# EAGLE board Electronics Design_PlantSynth v62 (EAGLE 9.7.0)
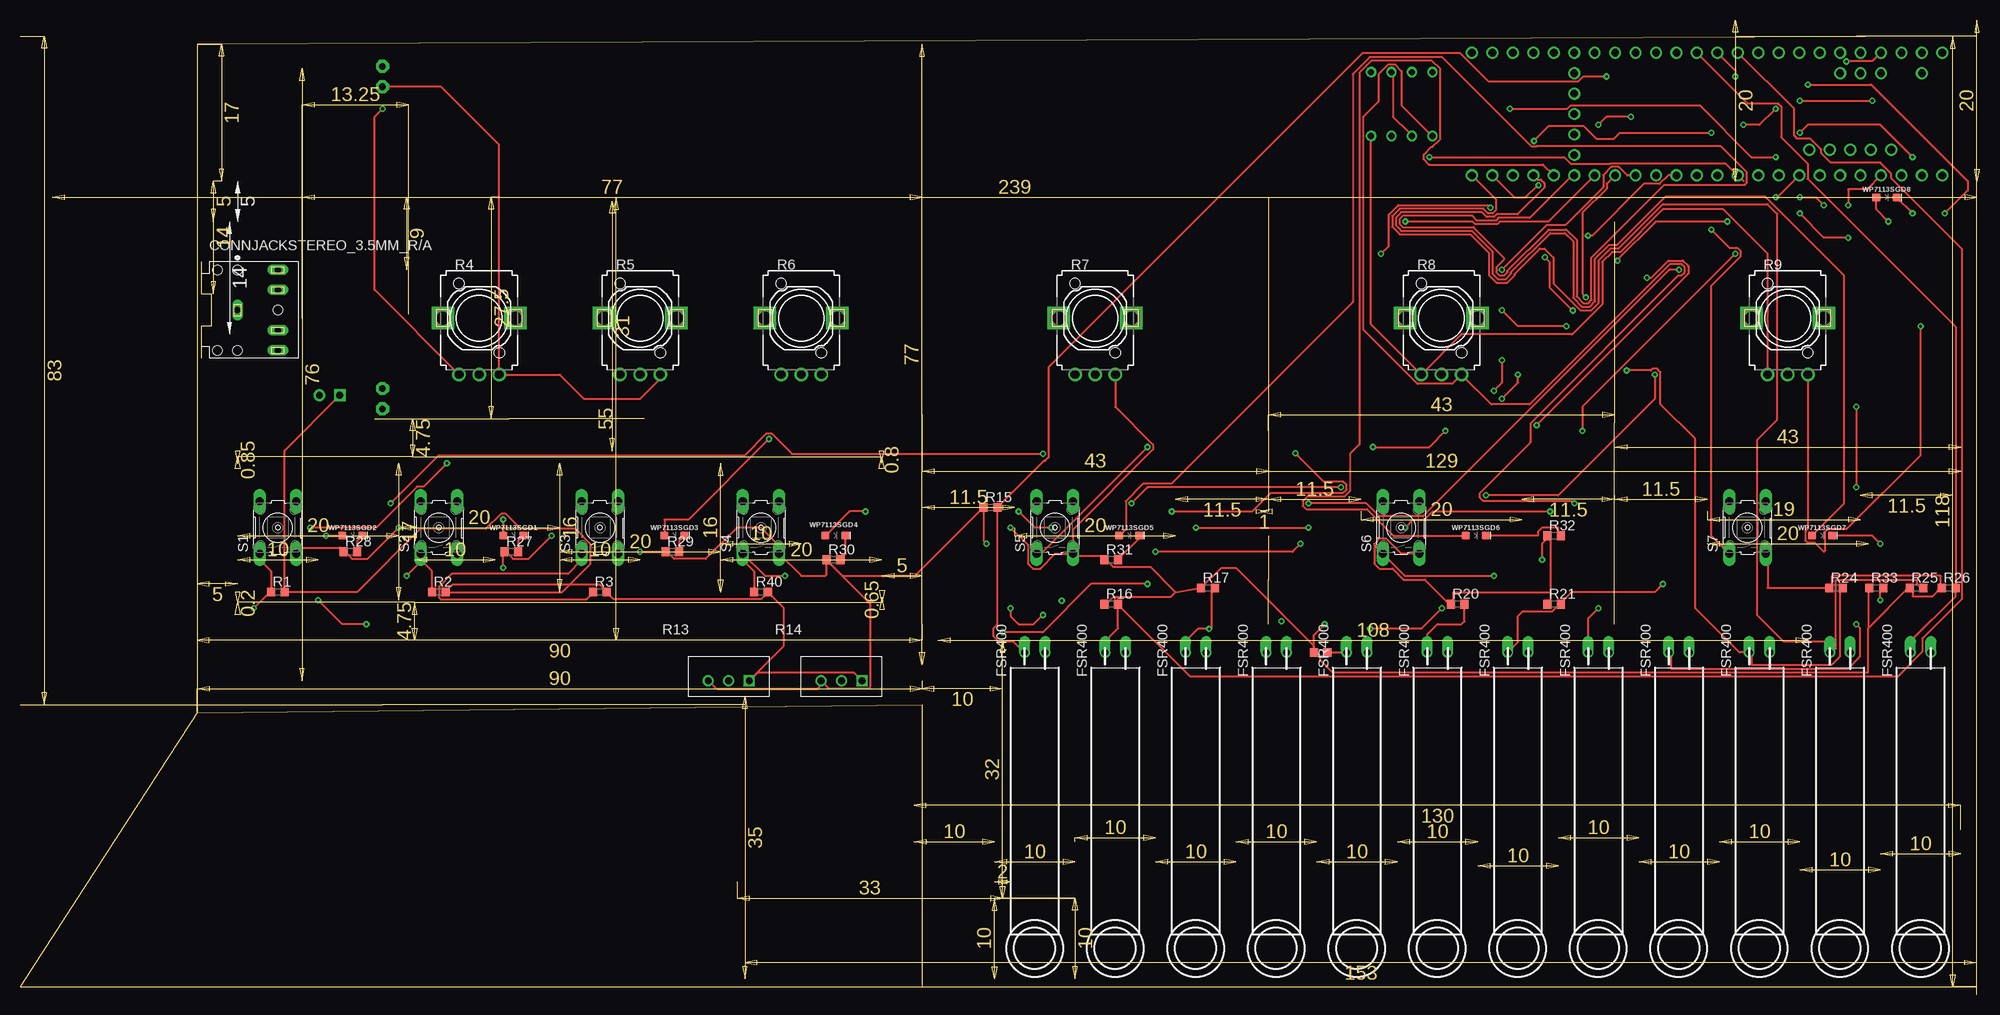
[diagram p0: board, top side]
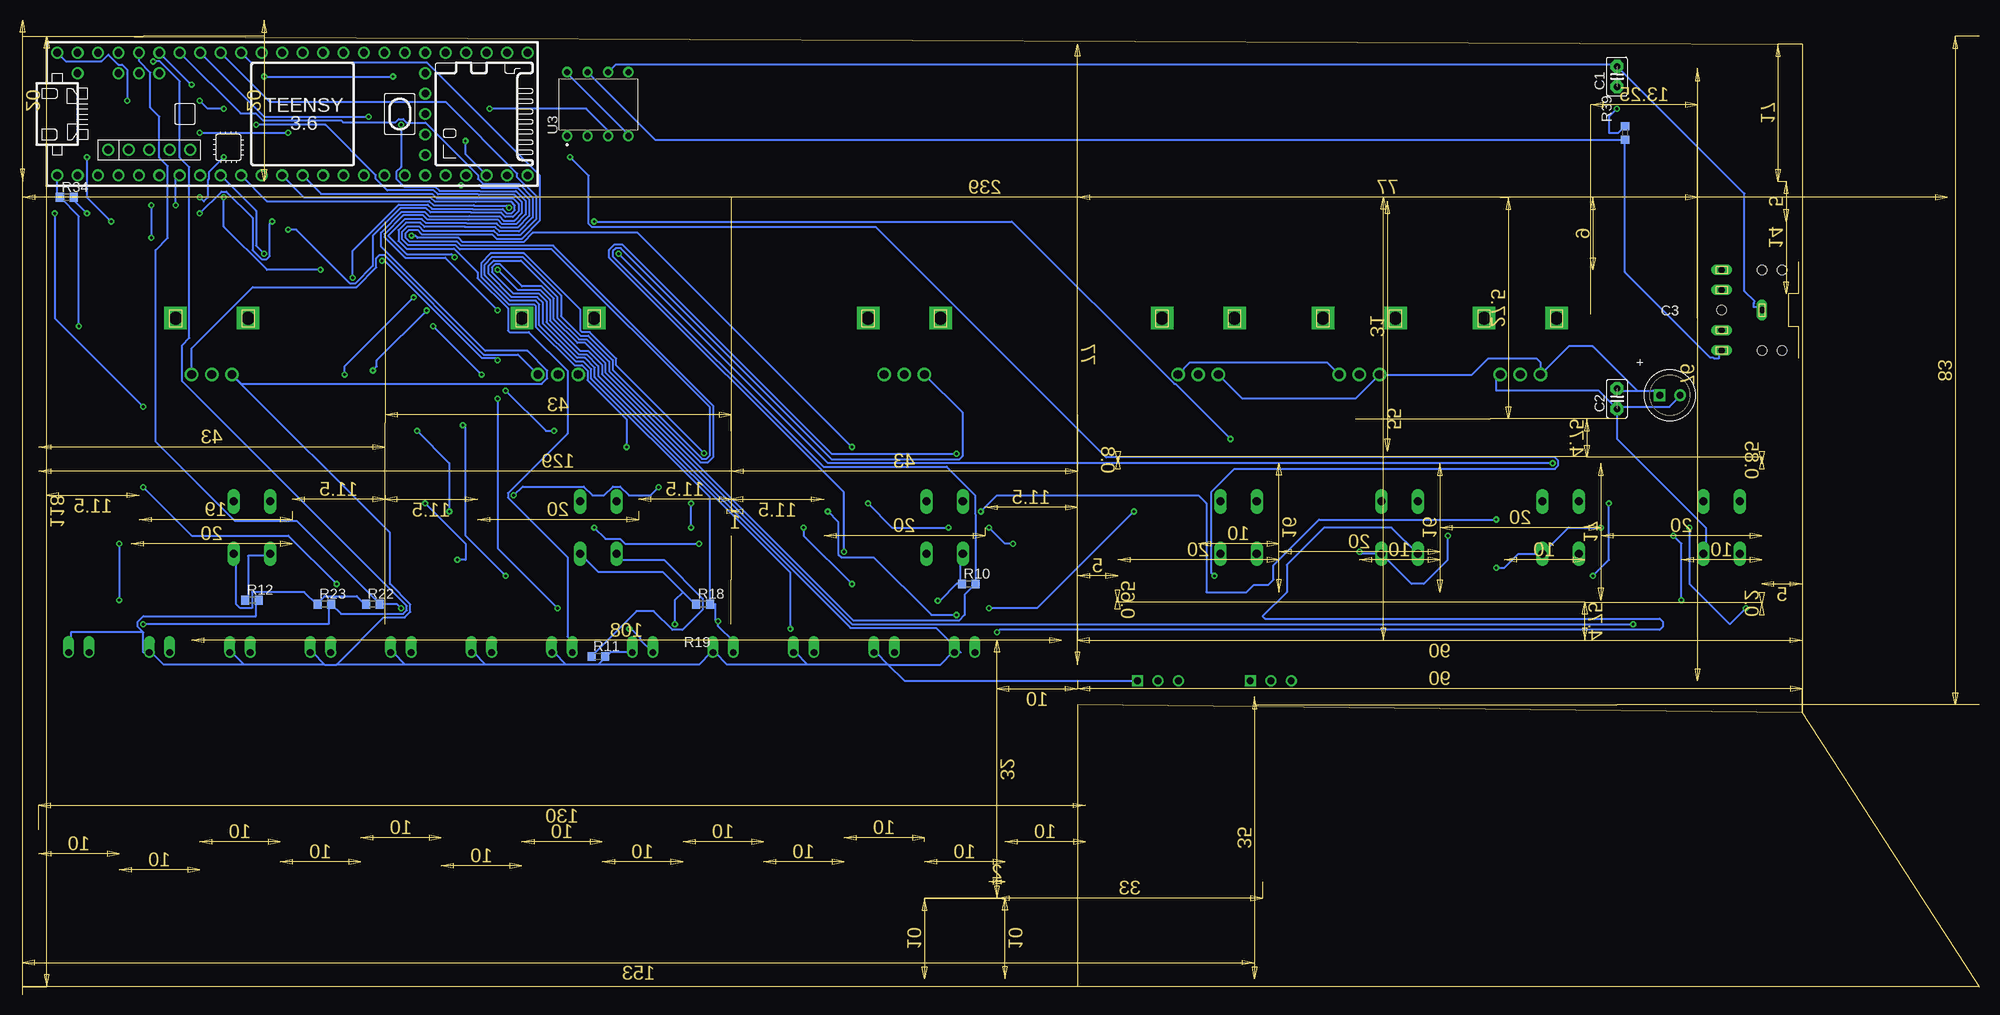
[diagram p1: board, bottom side, seen from below]

Size 243 x 118 mm. Coordinates in mm from the lower left corner, seen from the top.
Outline: 112,0 0,0 22,34
Outline: 112,0 243,0 243,118 22,117 22,34
Outline: 22,34 112,35 112,0
Copper layers (1*16): Top 0.035mm / dielectric 1.5mm / Bottom 0.035mm
Design rules "default *": minimum track width 0.24333125mm, minimum drill 0.35mm, track to track 8mil, track to pad 8mil, pad to pad 8mil, via to via 8mil, smd to smd 8mil, copper to edge 40mil, drill to drill 7mil, minimum pad ring 10mil, minimum via ring 8mil, stop-mask expansion 4mil, vias tented up to drill 0mil, thermal gap 10mil

## Footprints (pad centres in the part's own frame; a part is rotated, then mirrored left to right if it is on the bottom)
C2.5-2 = drill 0.813 pad 1.6 octagon: 1 -1.27,0; 2 1.27,0
ESK476M050AE3EA_47UF_CAP = drill 0.85 pad 1.45 square: LL+ -1.27,0 | drill 0.85 pad 1.45: LL- 1.27,0
CUI_SJ1-3525NG = drill 0.8 long: 1 0,0; 2 5,-5; 3 5,5; 4 5,-2.5; 5 5,2.5 | hole 1.2: -2.5,5; 0,5; 5,0; -2.5,-5; 0,-5
FSR400_.85 = drill 0.85 offset: P$1 -1.27,17; P$2 1.27,17
R0603 = smd 1 x 1.1: 1 -0.85,0; 2 0.85,0
EVUFXL = drill 1.1 pad 1.676: GND 2.5,-7; IN 0,-7; PWR -2.5,-7 | drill 1.6 pad 2.8 square: M1 4.5,0; M2 -4.5,0
B3B-XH-A = drill 0.85: GND -2.545,0; IN -0.005,0 | drill 0.85 square: POWER 2.545,0
B3F-10XX = drill 1.016 long: 1 -3.251,2.261; 2 3.251,2.261; 3 -3.251,-2.261; 4 3.251,-2.261
LMC555CN/NOPB-ND = drill 0.78 pad 1.13: 1 -6.51,5.08; 2 -6.51,2.54; 3 -6.51,0; 4 -6.51,-2.54; 5 1.43,-2.54; 6 1.43,0; 7 1.43,2.54; 8 1.43,5.08
TEENSY_3.5/3.6 = drill 0.965: 0/RX -25.4,-7.62; 1/TX -22.86,-7.62; 2 -20.32,-7.62; 3/CANTX -17.78,-7.62; 3V3 7.62,-7.62; 3V3_2 17.78,-2.54; 3V3_LO -22.86,7.62; 4/CANRX -15.24,-7.62; 5 -12.7,-7.62; 6 -10.16,-7.62; 7 -7.62,-7.62; 8 -5.08,-7.62; 9/CS -2.54,-7.62; 10/CS 0,-7.62; 11/MOSI 2.54,-7.62; 12/MISO 5.08,-7.62; 13/SCK 5.08,7.62; 14/A0 2.54,7.62; 15/A1 0,7.62; 16/A2 -2.54,7.62; 17/A3 -5.08,7.62; 18/A4/SDA -7.62,7.62; 19/A5/SCL -10.16,7.62; 20/A6 -12.7,7.62; 21/A7 -15.24,7.62; 21/DAC0 12.7,7.62; 22/A8 -17.78,7.62; 23/A9 -20.32,7.62; 24 10.16,-7.62; 25 12.7,-7.62; 26 15.24,-7.62; 27 17.78,-7.62; 28 20.32,-7.62; 29 22.86,-7.62; 30 25.4,-7.62; 31/A12 27.94,-7.62; 32/A13 30.48,-7.62; 33/A14 30.48,7.62; 34/A15 27.94,7.62; 35/A16 25.4,7.62; 36/A17 22.86,7.62; 37/A18 20.32,7.62; 38/A19 17.78,7.62; 39/A20 15.24,7.62; A10 -17.78,5.08; A11 -15.24,5.08; A22/DAC1 10.16,7.62; AGND -25.4,7.62; AREF -20.32,5.08; GND -27.94,-7.62; GND2 7.62,7.62; GND3 17.78,0; PROG 17.78,2.54; RESET 17.78,5.08; U5V -21.59,-4.445; UD+ -16.51,-4.445; UD- -19.05,-4.445; UGND1 -13.97,-4.445; UGND2 -11.43,-4.445; VBAT 17.78,-5.08; VIN -27.94,7.62; VUSB -25.4,5.08
LEDGREENDIFFUSED5MM = smd 1 x 1: A+ -1,0; C- 1.5,0

## Placement (x,y rotation side)
C1  4700pF  [C2.5-2]  45,113 90 bottom
C2  0.1uF  [C2.5-2]  45,73 90 bottom
C3  47uF  [ESK476M050AE3EA_47UF_CAP]  38.43,73.42 0 bottom
CONNJACKSTEREO_3.5MM_R/A  SJ1-3525NG  [CUI_SJ1-3525NG]  27,84 0 top
FSR1  FSR400_0.85  [FSR400_.85]  126,24.5 0 top
FSR2  FSR400_0.85  [FSR400_.85]  136,24.5 0 top
FSR3  FSR400_0.85  [FSR400_.85]  146,24.5 0 top
FSR4  FSR400_0.85  [FSR400_.85]  156,24.5 0 top
FSR5  FSR400_0.85  [FSR400_.85]  166,24.5 0 top
FSR6  FSR400_0.85  [FSR400_.85]  176,24.5 0 top
FSR7  FSR400_0.85  [FSR400_.85]  186,24.5 0 top
FSR8  FSR400_0.85  [FSR400_.85]  196,24.5 0 top
FSR9  FSR400_0.85  [FSR400_.85]  206,24.5 0 top
FSR10  FSR400_0.85  [FSR400_.85]  216,24.5 0 top
FSR11  FSR400_0.85  [FSR400_.85]  226,24.5 0 top
FSR12  FSR400_0.85  [FSR400_.85]  236,24.5 0 top
R1  10k  [R0603]  32,49 0 top
R2  10k  [R0603]  52,49 0 top
R3  10k  [R0603]  72,49 0 top
R4  EVU-F3LFL3D14F3L  [EVUFXL]  57,83 0 top
R5  EVU-F3LFL3D14F3L  [EVUFXL]  77,83 0 top
R6  EVU-F3LFL3D14F3L  [EVUFXL]  97,83 0 top
R7  EVU-F3LFL3D14F3L  [EVUFXL]  133.5,83 0 top
R8  EVU-F3LFL3D14F3L  [EVUFXL]  176.5,83 0 top
R9  EVU-F3LFL3D14F3L  [EVUFXL]  219.5,83 0 top
R10  10k  [R0603]  125.5,50 0 bottom
R11  10k  [R0603]  171.5,41 0 bottom
R12  10k  [R0603]  214.5,48 0 bottom
R13  [B3B-XH-A]  88,38 0 top
R14  [B3B-XH-A]  102,38 0 top
R15  10k  [R0603]  120.5,59.5 0 top
R16  10k  [R0603]  135.5,47.5 0 top
R17  10k  [R0603]  147.5,49.5 0 top
R18  10k  [R0603]  158.5,47.5 0 bottom
R19  10k  [R0603]  161.5,41.5 0 top
R20  10k  [R0603]  178.5,47.5 0 top
R21  10k  [R0603]  190.5,47.5 0 top
R22  10k  [R0603]  199.5,47.5 0 bottom
R23  10k  [R0603]  205.5,47.5 0 bottom
R24  10k  [R0603]  225.5,49.5 0 top
R25  10k  [R0603]  235.5,49.5 0 top
R26  10k  [R0603]  239.5,49.5 0 top
R27  125  [R0603]  61,54 0 top
R28  125  [R0603]  41,54 0 top
R29  125  [R0603]  81,54 0 top
R30  125  [R0603]  101,53 0 top
R31  125  [R0603]  135.5,53 0 top
R32  125  [R0603]  190.5,56 0 top
R33  125  [R0603]  230.5,49.5 0 top
R34  125  [R0603]  237.5,98 0 bottom
R39  100k  [R0603]  44,106 90 bottom
R40  10k  [R0603]  92,49 0 top
S1  [B3F-10XX]  32,57 90 top
S2  [B3F-10XX]  52,57 90 top
S3  [B3F-10XX]  72,57 90 top
S4  [B3F-10XX]  92,57 90 top
S5  [B3F-10XX]  128.5,57 90 top
S6  [B3F-10XX]  171.5,57 90 top
S7  [B3F-10XX]  214.5,57 90 top
U3  LMC555CN  [LMC555CN/NOPB-ND]  170.29,112.11 90 bottom
U$1  TEENSY_3.5/3.6  [TEENSY_3.5/3.6]  210.77,108.34 0 bottom
WP7113SGD1  [LEDGREENDIFFUSED5MM]  61,56 0 top
WP7113SGD2  [LEDGREENDIFFUSED5MM]  41,56 0 top
WP7113SGD3  [LEDGREENDIFFUSED5MM]  81,56 0 top
WP7113SGD4  [LEDGREENDIFFUSED5MM]  101,56 0 top
WP7113SGD5  [LEDGREENDIFFUSED5MM]  137.5,56 0 top
WP7113SGD6  [LEDGREENDIFFUSED5MM]  180.5,56 0 top
WP7113SGD7  [LEDGREENDIFFUSED5MM]  223.5,56 0 top
WP7113SGD8  [LEDGREENDIFFUSED5MM]  231.5,98 0 top

## Library data of the parts
C1 C2 = capacitor-wima
C3 = Capacitor_47uF
CONNJACKSTEREO_3.5MM_R/A = SJ1-3525NG; MANUFACTURER: CUI; PARTREV: 1.01; STANDARD: Manufacturer recommendation
FSR1-FSR12 = FSR400
R1-R3 R10-R12 R15-R34 R39 R40 = rcl; SPICEPREFIX: R
R4-R9 = EVU-F3LFL3D14_US
R13 R14 = Pot_16mm
S1-S7 = B3F-1020_OMRON; MPN: B3F-1000; OC_FARNELL: 176432; OC_NEWARK: 36M3542
U3 = LMC555CN:NOPB-ND
U$1 = Teensy356
WP7113SGD1-WP7113SGD8 = KingBright_LED_WP7113SGD

## Nets
2: U$1.2 WP7113SGD4.A+
5: U3.3 U$1.5
6: R3.1 S3.1 U$1.6
7: R2.1 S2.1 U$1.7
8: R1.1 S1.1 U$1.8
9: R40.1 S4.1 U$1.9/CS
10: R11.1 S6.1 U$1.10/CS
11: R12.1 S7.1 U$1.11/MOSI
12: R10.1 S5.1 U$1.12/MISO
24: U$1.24 WP7113SGD2.A+
25: U$1.25 WP7113SGD1.A+
26: U$1.26 WP7113SGD3.A+
27: U$1.27 WP7113SGD5.A+
28: U$1.28 WP7113SGD6.A+
29: U$1.29 WP7113SGD7.A+
30: U$1.30 WP7113SGD8.A+
A0: FSR12.P$1 R26.2 U$1.14/A0
A1: FSR1.P$1 R15.2 U$1.15/A1
A2: FSR2.P$1 R16.2 U$1.16/A2
A3: FSR3.P$1 R17.2 U$1.17/A3
A4: FSR4.P$1 R18.2 U$1.18/A4/SDA
A5: FSR5.P$1 R19.2 U$1.19/A5/SCL
A6: FSR6.P$1 R20.2 U$1.20/A6
A7: FSR7.P$1 R21.2 U$1.21/A7
A8: FSR8.P$1 R22.2 U$1.22/A8
A9: FSR9.P$1 R23.2 U$1.23/A9
A12: FSR10.P$1 R24.2 U$1.31/A12
A13: FSR11.P$1 R25.2 U$1.32/A13
A14: R13.IN
A15: R14.IN
A16: R7.IN
A17: R8.IN
A18: R9.IN
A19: R4.IN
A20: R5.IN
A21: R6.IN
GND: C1.1 C2.1 C3.LL- R4.GND R5.GND R6.GND R7.GND R8.GND R9.GND R13.GND R14.GND R15.1 R16.1 R17.1 R18.1 R19.1 R20.1 R21.1 R22.1 R23.1 R24.1 R25.1 R26.1 R27.1 R28.1 R29.1 R30.1 R31.1 R32.1 R33.1 R34.1 S1.3 S2.3 S3.3 S4.3 S5.3 S6.3 S7.3 U3.1 U$1.GND
N$1: R28.2 WP7113SGD2.C-
N$2: R27.2 WP7113SGD1.C-
N$3: R29.2 WP7113SGD3.C-
N$4: R30.2 WP7113SGD4.C-
N$5: R31.2 WP7113SGD5.C-
N$6: R32.2 WP7113SGD6.C-
N$7: R33.2 WP7113SGD7.C-
N$8: R34.2 WP7113SGD8.C-
SLEEVE: C1.2 CONNJACKSTEREO_3.5MM_R/A.1 U3.2 U3.6
TIP: CONNJACKSTEREO_3.5MM_R/A.2 R39.1 U3.7
VCC: C2.2 C3.LL+ FSR1.P$2 FSR2.P$2 FSR3.P$2 FSR4.P$2 FSR5.P$2 FSR6.P$2 FSR7.P$2 FSR8.P$2 FSR9.P$2 FSR10.P$2 FSR11.P$2 FSR12.P$2 R1.2 R2.2 R3.2 R4.PWR R5.PWR R6.PWR R7.PWR R8.PWR R9.PWR R10.2 R11.2 R12.2 R13.POWER R14.POWER R39.2 R40.2 U3.4 U3.8 U$1.VIN

## Tracks (layer width: path | path; a pad name or v marks a point on that pad's centre or on a via)
2  (via drill 0.35)
  Top 0.243: U$1.2 229.37,99 227,99 v227,97 | v227,93 224,93 v221,96 | v183,74 184,75 v184,77.78 | v177,69 175,67 v168,67 | v143,59 153,59 155.3,61.3 164.29,61.3 164.7,61.71 164.7,62.29 164.29,62.7 161.89,62.7 v158.35,66.24 | v105,59 103,59 WP7113SGD4.A+ | v123,47 123,45.99 123.99,45 125.85,45 v127,46.15 | v212,95 203.12,95 198.37,90.25 v198.37,90.14
  Bottom 0.243: v227,97 v227,93 | v183,74 178,69 v177,69 | v123,47 117,47 v105,59 | v221,96 v220.99,96 218.29,98.7 217.71,98.7 214.45,95.44 214.45,91.45 213.29,90.3 212.71,90.3 212.3,90.71 212.3,94.7 v212,95 | v143,59 141.7,57.7 141.7,53.71 141.29,53.3 137.3,53.3 130.15,46.15 v127,46.15 | v158.35,66.24 169.26,77.15 169.26,77.96 172.58,81.28 173.53,81.28 173.72,81.47 173.72,84.04 180.73,91.04 184.85,91.04 186.04,89.85 186.04,88.15 182.61,84.72 179.47,84.72 179.28,84.53 179.28,81.96 174.47,77.16 173.52,77.16 172.84,76.48 172.84,75.31 168,70.47 | 168,70.47 v168,67 | v198.37,90.14 198,90.14 185.9,78.04 184.26,78.04 v184,77.78 | 168,70.47 v168,67 | 168,70.47 v168,67
5  (via drill 0.35)
  Top 0.243: v185,109 192.14,109 192.55,109.4 208.6,109.4 215,103 v218,103 | v221,98 223,98 v224,97
  Bottom 0.243: U3.3 170.29,106.29 173,109 v185,109 | v218,103 219.87,101.13 219.87,100.28 220,100.15 220,97.99 220.49,97.49 v221,98 | v224,97 224,100.19 U$1.5
6  (via drill 0.35)
  Top 0.243: S3.1 69.74,52.99 68.02,51.27 53.61,51.27 52.02,49.69 52.02,48.31 52.22,48.12 70.33,48.12 71.15,48.95 R3.1 | U$1.6 218.21,98 v218,98 | v160,60 167.19,60 168.79,58.4 174.21,58.4 204.81,89 v206,89 | v122,44 127,44 133,50 v140,50 | v146,57 v160,57
  Bottom 0.243: v140,50 146,56 v146,57 | v160,57 v160,60 | v218,98 218,94.37 212.63,89 v206,89 | v122,44 121.7,44.3 39.71,44.3 39.3,44.71 39.3,45.29 39.71,45.7 88.7,45.7 89,46 86,49 86,52.37 81.37,57 72.99,57 S3.1
7  (via drill 0.35)
  Top 0.243: R2.1 51.15,51.58 49.74,52.99 S2.1 49.74,52.74 v48,51 | v213,91 194,72 v194,69 | v190,59 175.44,59 174.4,57.96 172.96,57.96 v172,57 | v159,55 158,54 v141,54 | v46,60 52,66 90.01,66 92.71,68.7 93.29,68.7 95.84,66.15 v127,66.15
  Bottom 0.243: U$1.7 214,96.33 214,92 v213,91 | v194,69 190,65 v190,59 | v159,55 168.19,55 168.79,55.6 170.6,55.6 v172,57 | v46,60 46,53 v48,51 | v141,54 141,61.37 170.15,90.52 170.15,91.48 169.48,92.15 168.52,92.15 142.52,66.15 v127,66.15
8  (via drill 0.35)
  Top 0.243: S1.1 29.74,52.99 31.15,51.58 R1.1 31,49 v29,47 | v53,65 50.1,62.1 49.29,62.1 44.19,57 v36,57 | v182.57,96.72 182.25,97.04 171.15,97.04 169.96,95.85 169.96,91.96 v169,91
  Bottom 0.243: v169,91 143,65 v53,65 | v36,57 36,50 31,45 v29,47 | v182.57,96.72 | U$1.8 212.66,97.53 192.49,97.53 191.97,97.02 186.95,97.02 186.92,96.98 182.83,96.98 v182.57,96.72
9  (via drill 0.35)
  Top 0.243: R40.1 91.15,51.58 89.74,52.99 S4.1 92.49,51 v95,51 | v175,103 191.75,103 192.55,102.2 197.41,102.2 197.44,102.23 211.77,102.23 214,100 214,100.03 U$1.9/CS
  Bottom 0.243: v95,51 95.35,51.35 95.35,61.46 92.51,64.3 52.71,64.3 52.3,64.71 52.3,65.29 52.71,65.7 108.44,65.7 137.04,94.3 172.29,94.3 172.7,94.71 172.7,100.7 v175,103
10  (via drill 0.35)
  Top 0.243: v183,51 171.99,51 S6.1 | v188.31,69.69 207.15,88.52 207.15,89.48 206.48,90.15 204.69,90.15 202.54,88 v202,88
  Bottom 0.243: S6.1 169.24,52.99 163.33,52.99 158.53,48.19 158.53,46.81 161.04,44.3 162.29,44.3 164.62,46.62 166.78,46.62 172.35,41.05 R11.1 | v183,51 188,56 188,69.37 v188.31,69.69 | v202,88 202,91.37 196.29,97.08 192.67,97.08 192.16,96.57 187.14,96.57 187.1,96.53 183.38,96.53 182.86,96.02 182.28,96.02 181.87,96.43 181.87,97.01 182.28,97.43 186.73,97.43 186.77,97.47 191.79,97.47 192.3,97.98 208.02,97.98 U$1.10/CS
11  (via drill 0.35)
  Top 0.243: S7.1 210,55.99 210,87.01 213.7,90.71 213.7,91.29 213.29,91.7 212.3,91.7 v210,94
  Bottom 0.243: R12.1 215,48 215,53.5 212.5,53.5 S7.1 | v210,94 208.99,94 202.29,87.3 201.71,87.3 199.52,89.49 199.52,93.23 196.1,96.64 192.86,96.64 192.34,96.13 187.32,96.13 187.29,96.09 183.56,96.09 183.04,95.57 182.09,95.57 181.42,96.24 181.42,97.19 182.1,97.88 186.55,97.88 186.58,97.91 191.6,97.91 192.12,98.42 205.93,98.42 U$1.11/MOSI
12  (via drill 0.35)
  Top 0.243: v140,67 126.75,53.75 S5.1 | v194.7,93.26 195.22,93.26 201.63,99.66 203.59,99.66 204.65,100.72 U$1.12/MISO
  Bottom 0.243: 126.5,50 127,50 129,48 v129.35,47.92 | 126.5,50 126.5,53.5 S5.1 | 126.5,50 R10.1 | v140,67 166.6,93.6 179.63,93.6 180.79,92.44 188.33,92.44 188.86,92.96 193.96,92.96 194.26,93.26 v194.7,93.26
24  (via drill 0.35)
  Top 0.243: U$1.24 199.57,100.72 198.51,101.78 197.63,101.78 196.59,100.75 196.59,99.28 191.86,94.55 189.55,94.55 v184,89 | v38,56 WP7113SGD2.A+ | v43,45 40,45 v37,48
  Bottom 0.243: v184,89 181.51,86.51 178.73,86.51 177.49,85.27 177.49,82.7 173.74,78.95 172.78,78.95 171.05,77.22 171.05,76.05 140,45 v43,45 | v37,48 37,55 v38,56
25  (via drill 0.35)
  Top 0.243: v203,76 203,73 191,61 v182,61 | v164,62 140,62 v138,60 | v128,57 126,57 v124,59 | v60,58 WP7113SGD1.A+ | U$1.25 197.03,99.69 197.03,99.1 194,96.06 194,86 v194.43,85.57
  Bottom 0.243: v203,76 203,77 v194.43,85.57 | v164,62 165,61 167.69,61 168.79,62.1 169.69,62.1 170.79,61 172.21,61 173.31,62.1 180.9,62.1 v182,61 | v138,60 135,57 v128,57 | v124,59 122,61 97,61 96,60 96,49 91,49 90.1,49.9 88.29,49.9 87.65,50.54 87.65,52.35 82,58 v60,58
26  (via drill 0.35)
  Top 0.243: U$1.26 189.81,95 183.74,95 183.41,94.68 180.72,94.68 180.4,95 v172,95 | v93,68 83,58 80,58 WP7113SGD3.A+
  Bottom 0.243: v93,68 99.84,74.84 99.98,74.84 120.14,95 v172,95
27
  Top 0.243: WP7113SGD5.A+ 137.3,56.8 137.3,60.29 139.45,62.45 142.95,62.45 165.49,84.99 165.49,113.28 167.61,115.4 176.6,115.4 187.71,104.3 188.29,104.3 188.32,104.32 211.21,104.32 214.45,101.08 214.45,99.81 214.19,99.55 204.15,99.55 195.13,90.53 195.13,85.28 194.72,84.87 194.14,84.87 193.3,85.71 193.3,92.71 192,94.01 189.83,94.01 184.7,88.88 184.7,88.71 184.29,88.3 183.71,88.3 183.3,88.71 183.3,89.29 184.25,90.24 184.25,90.52 180.47,94.3 171.71,94.3 171.3,94.71 171.3,95.29 171.71,95.7 180.33,95.7 180.91,95.12 183.23,95.12 183.55,95.45 187.45,95.45 192.73,100.72 U$1.27
28
  Top 0.243: U$1.28 189.12,102.05 174.96,102.05 174.3,102.71 174.3,103.29 175.26,104.25 175.4,104.25 176.34,105.2 176.34,113.94 175.32,114.95 167.79,114.95 166.34,113.5 166.34,67.33 165.15,66.14 165.15,61.52 164.48,60.85 159.86,60.85 159.3,60.29 159.3,59.71 159.71,59.3 167.26,59.3 170.56,56 WP7113SGD6.A+
29
  Top 0.243: WP7113SGD7.A+ 226.47,59.97 226.47,88.3 216.64,98.12 204.35,98.12 198.34,92.11 197.34,92.11 195.58,90.34 195.58,85.1 194.9,84.42 193.95,84.42 192.85,85.52 192.85,92.52 191.81,93.56 190.01,93.56 185.15,88.7 185.15,88.52 184.48,87.85 183.52,87.85 182.85,88.52 182.85,91.28 180.28,93.85 171.52,93.85 170.85,94.52 170.85,95.48 171.52,96.15 181.51,96.15 182.09,95.57 183.04,95.57 183.37,95.89 185.94,95.89 189.26,99.22 189.26,99.8 188.85,100.21 188.42,100.21 U$1.29
30  (via drill 0.35)
  Top 0.243: v188,105 189.86,106.86 194.14,106.86 195.71,105.3 197.93,105.3 198.63,106 v210,106 | v221,106 222,107 231,107 v235,103 | v232,95 230.5,96.5 WP7113SGD8.A+
  Bottom 0.243: U$1.30 188,103.36 v188,105 | v221,106 v210,106 | v235,103 235,98 v232,95
A0
  Top 0.243: FSR12.P$1 234.73,42.86 240.35,48.48 R26.2 240.35,81.92 221.99,100.28 221.99,102.2 218.7,105.49 218.7,109.29 218.29,109.7 214.49,109.7 U$1.14/A0
A1  (via drill 0.35)
  Top 0.243: U$1.15/A1 213,113.73 v213,113 | v197,113 194.07,113 193.43,112.36 182.39,112.36 178.85,115.9 166.7,115.9 127.7,76.9 127.7,65.71 127.29,65.3 127.15,65.3 R15.2 121.35,44.98 120.85,44.48 120.85,43.52 121.52,42.85 123.38,42.85 FSR1.P$1
  Bottom 0.243: v213,113 v197,113
A2
  Top 0.243: FSR2.P$1 134.73,42.86 136.35,44.48 R16.2 136.35,47.45 145.25,38.55 233.2,38.55 236.27,41.62 236.27,43.27 241.18,48.18 241.18,91.55 232.36,100.37 232.36,100.95 231,102.31 224.82,102.31 223.68,103.46 223.68,103.92 222.3,105.3 220.71,105.3 220.3,105.71 220.3,108.97 U$1.16/A2
A3  (via drill 0.35)
  Top 0.243: R17.2 148,49.5 148,44.5 v147.65,44.42 146.29,44.42 144.73,42.86 FSR3.P$1
  Bottom 0.243: U$1.17/A3 214.58,114.69 192.76,114.69 178.74,100.68 178.74,95.13 180.98,92.89 184.15,92.89 184.67,93.41 193.41,93.41 193.97,93.96 194.99,93.96 195.41,93.55 195.41,92.97 194.96,92.52 189.04,92.52 188.52,91.99 177.1,91.99 157.2,72.09 157.2,65.77 157.88,65.09 158.83,65.09 170.16,76.42 170.16,77.59 172.95,80.38 173.9,80.38 176.6,83.07 176.6,85.64 181.1,90.15 184.48,90.15 185.15,89.48 185.15,88.52 182.24,85.62 179.1,85.62 178.38,84.9 178.38,82.33 174.1,78.06 173.15,78.06 171.94,76.85 171.94,75.68 147.65,51.39 v147.65,44.42
A4  (via drill 0.35)
  Bottom 0.243: 156.65,45.42 157,45.5 157,47.5 R18.2 157.65,60.76 172.39,75.5 172.39,76.67 173.33,77.61 174.29,77.61 178.83,82.15 178.83,84.72 179.28,85.17 182.43,85.17 185.6,88.34 185.6,89.66 184.66,90.6 180.92,90.6 176.15,85.83 176.15,83.26 173.72,80.83 172.76,80.83 169.71,77.78 169.71,76.61 158.64,65.54 158.06,65.54 157.65,65.95 157.65,71.91 177.28,91.54 188.7,91.54 189.23,92.07 195.14,92.07 195.85,92.78 195.85,93.73 195.18,94.41 193.78,94.41 193.23,93.86 184.49,93.86 183.97,93.34 181.17,93.34 179.19,95.32 179.19,98.12 181.56,100.49 181.56,100.95 190.41,109.81 212.23,109.81 U$1.18/A4/SDA | FSR4.P$1 154.73,42.86 156.65,44.78 156.65,45.42 | 156.65,45.42 v156.62,45.39
A5  (via drill 0.35)
  Top 0.243: R19.2 FSR5.P$1 | v196,107 197,108 v200,108 | v184,84 186,82 v192,82 | v186,76 186,75 v184,73 | v176.57,47 173.99,44.42 v167.65,44.42
  Bottom 0.243: FSR5.P$1 166.27,43.04 166.27,43.27 167.41,44.42 v167.65,44.42 | U$1.19/A5/SCL 212.97,108 v200,108 | v196,107 196,101.75 196.59,101.16 196.59,100.28 195.62,99.32 191.75,99.32 191.23,98.81 186.21,98.81 186.18,98.77 181.73,98.77 180.53,97.56 180.53,95.87 181.72,94.68 183.41,94.68 183.93,95.19 187.66,95.19 187.69,95.23 192.71,95.23 193.22,95.75 195.73,95.75 198.04,93.44 198.04,93.07 195.48,90.51 190.51,90.51 v184,84 | v192,82 v186,76 | v184,73 184,54.43 v176.57,47
A6
  Top 0.243: FSR6.P$1 174.73,43.73 176,45 179,45 179.35,45.35 R20.2
  Bottom 0.243: U$1.20/A6 215.93,108.42 214.02,108.42 213.15,107.55 203.45,107.55 203.2,107.3 196.7,107.3 196.29,107.7 195.71,107.7 195.29,107.28 192.97,107.28 186.43,100.75 186.43,100.28 185.81,99.66 181.36,99.66 179.63,97.94 179.63,95.5 181.35,93.78 183.78,93.78 184.3,94.3 188.03,94.3 188.06,94.34 193.08,94.34 193.59,94.85 195.36,94.85 196.3,93.92 196.3,92.59 195.33,91.62 189.41,91.62 186.49,88.7 186.49,87.97 182.72,84.2 182.72,81.47 182.53,81.28 180.13,81.28 175.34,76.48 175.34,68.66 182.7,61.29 182.7,60.71 175.34,53.34 175.34,43.47 174.73,42.86 FSR6.P$1
A7  (via drill 0.35)
  Top 0.243: FSR7.P$1 186,42.77 186,46 186.62,46.62 190.28,46.62 191.16,47.5 | 191.16,47.5 R21.2 | v222,112 229.86,112 241.86,100 241.86,98.86 v239,96 | v228,72 v228,62 | v204,50 203,49 192.66,49 191.16,47.5
  Bottom 0.243: U$1.21/A7 222.04,112 v222,112 | v239,96 239,83 v228,72 | v228,62 222,56 210,56 v204,50
A8  (via drill 0.35)
  Top 0.243: FSR8.P$1 194.73,45.73 v196,47
  Bottom 0.243: v196,47 196.5,47.5 R22.2 198.65,47.55 208.9,57.8 216.6,57.8 226.47,67.66 226.47,91.44 224.95,92.96 224.95,101.88 226.01,102.94 226.01,108.03 227.12,109.14 227.12,113.5 228.53,114.9 228.53,115.94 U$1.22/A8
A9  (via drill 0.35)
  Top 0.243: v228,45 228.5,44.5 228.5,41 227,39.5 205,39.5 205,41.5 FSR9.P$1 | U$1.23/A9 230.03,114.9 226.81,114.9 v226.78,114.87
  Bottom 0.243: v228,45 205,45 205,47.5 R23.2 203.45,46.3 195.71,46.3 195.3,46.71 195.3,47.29 223.16,75.16 223.16,79.65 222.28,80.54 222.28,101.75 223.47,102.94 223.47,112.38 225.95,114.87 v226.78,114.87
A12  (via drill 0.35)
  Top 0.243: R24.2 226,49.5 226,41 225,40 215,40 215,41.5 FSR10.P$1 213.5,41.5 208,47 208,68 203.7,72.3 203.7,76.29 203.29,76.7 202.71,76.7 202.51,76.5 v199.5,76.5 | U$1.31/A12 185.55,98 186.94,98 188.45,99.51 v188.56,99.51 | v189.35,90.57 189.96,89.96 189.96,86.79 v192.8,83.95
  Bottom 0.243: v199.5,76.5 199,77 199,77.75 v192.8,83.95 | v188.56,99.51 186.29,99.51 185.99,99.21 181.54,99.21 180.08,97.75 180.08,95.69 181.54,94.23 183.6,94.23 184.12,94.75 187.84,94.75 187.88,94.79 192.9,94.79 193.41,95.3 195.55,95.3 197.59,93.26 195.29,90.96 189.74,90.96 v189.35,90.57
A13
  Top 0.243: R25.2 236,49.5 235.5,50 235.5,50.5 225.5,50.5 225.5,42 225,41.5 FSR11.P$1 224.73,42.86 218.97,42.86 215.67,46.15 215.67,67.85 218.16,70.34 218.16,95.97 216.99,97.15 204.01,97.15 198.52,91.66 197.52,91.66 196.02,90.16 196.02,84.91 195.09,83.98 193.77,83.98 190.4,87.34 190.4,90.51 189.29,91.62 188.71,91.62 185.6,88.51 185.6,88.34 184.66,87.4 183.34,87.4 182.4,88.34 182.4,91.1 180.1,93.4 171.34,93.4 170.4,94.34 170.4,95.66 171.34,96.6 181.7,96.6 182.28,96.02 182.86,96.02 183.27,96.43 183.27,97.74 U$1.32/A13
GND  (via drill 0.35)
  Top 0.243: S7.3 217,53.5 217,49.5 R24.1 225,49.5 225,51 238.5,51 238.5,49.5 | 229.5,44.5 229.5,49.5 R33.1 | 229.5,44.5 229.5,39 163,39 161.5,40.5 161.5,41 161,41.5 R19.1 | 229.5,44.5 234.5,49.5 R25.1 235,49.5 235,48.5 237.5,48.5 238.5,49.5 | 238.5,49.5 R26.1 | 190,56 190,49 | 190,49 190,47.5 R21.1 | 190,56 R32.1 | 190,49 178,49 178,47.5 R20.1 177.5,47.5 174.45,50.55 171.8,50.55 170.46,51.9 168.79,51.9 168.15,52.54 168.15,54.96 168.79,55.6 169.69,55.6 171.54,53.75 S6.3 | 143.5,49 R17.1 149.15,52 151,52 160.65,42.35 R19.1 | S5.3 131,53.5 134.5,53.5 134.5,53 R31.1 134.84,53 135.72,52.12 140.38,52.12 143.5,49 | U3.1 171.54,109.43 171.54,113.66 170.69,114.51 169.89,114.51 168.72,113.34 168.72,109.93 166.78,108 166.78,81.57 173.52,74.84 177.84,74.84 R8.GND 182.7,72.3 187.47,72.3 204.88,89.7 206.29,89.7 206.7,89.29 206.7,88.71 206.29,88.3 205.93,88.3 187.61,69.98 187.61,67.6 181.3,61.29 181.3,60.71 181.71,60.3 192.7,60.3 v193,60 | 100.15,52.95 R30.1 102.15,51 111.15,51 R15.1 119.65,55.35 v120,55 | 100.15,52.95 105.55,47.55 105.55,37.19 105.36,37 100.46,37 R14.GND 99.45,37.45 99,37 91.36,37 86.46,37 R13.GND | S1.3 34.26,54.51 39.69,54.51 40.15,54.05 R28.1 40.34,54 41.22,53.12 43.12,53.12 v47,57 | C1.1 52.27,111.73 59.5,104.5 R4.GND 67,76 70,73 77,73 79.5,75.5 R5.GND | 143.5,49 142.88,48.38 135.72,48.38 134.84,47.5 R16.1 | R19.1 160.65,43.65 v162,45 | v60,52 60,53.85 R27.1 60.34,54 61.22,53.12 63.12,53.12 v66,56 | v77,54 R29.1 80.34,54 81.22,53.12 85.12,53.12 89,57 92,57 94.26,54.74 S4.3 97.01,51 100,51 100.15,51.15 100.15,52.95 | S5.3 130.76,56.76 140.7,66.7 140.7,67.29 136,71.99 R7.GND
  Top 0.243: R9.GND 222,56.87 221.68,56.55 221.68,55.45 221.95,55.17 222.82,55.17 224,54 224.18,54.17 224.18,56.55 224.45,56.83 226.82,56.83 236,66 v236,82 | v189,53 189,55 190,56 | S5.3 128.54,53.75 126.69,51.9 125.79,51.9 125.15,52.54 125.15,54.85 v123,57
  Bottom 0.243: R5.GND 81,77.5 98,77.5 R6.GND | 206.5,47.5 205.5,48.5 201.5,48.5 200.5,47.5 R22.1 | 206.5,47.5 208,49 214.5,49 214.5,47 216,47 216.5,47.5 216.5,53.5 S7.3 | 206.5,47.5 R23.1 | C3.LL- 37.5,73 38.5,72 45,72 C2.1 | 161,49 163.5,51.5 171.5,51.5 173.5,53.5 S6.3 | 161,49 159.5,47.5 R18.1 | U$1.GND 238.71,98.36 R34.1 236,95.65 v236,82 | C2.1 45,68 34,57 34,54.01 S1.3 | C2.1 47.27,74 60,74 60,75.5 R4.GND | v162,45 162,48 161,49 | v60,52 59.01,52 57.26,53.75 S2.3 51.01,57 v47,57 | v66,56 66,53 69,50 70.51,50 S3.3 76.75,53.75 v77,54 | v120,55 121,55 v123,57 | v193,60 188,55 188,53 v189,53 | R9.GND 222,79.26 214.41,86.85 201.52,86.85 199.07,89.3 199.07,90.44 198.66,90.85 198.08,90.85 185.72,78.49 181.49,78.49 R8.GND
N$1
  Top 0.243: WP7113SGD2.C- 41.85,55.35 R28.2
N$2
  Top 0.243: R27.2 61.85,55.35 WP7113SGD1.C-
N$3
  Top 0.243: R29.2 81.85,55.35 WP7113SGD3.C-
N$4
  Top 0.243: R30.2 101.85,53.05 102.5,53.7 WP7113SGD4.C-
N$5
  Top 0.243: R31.2 136.35,53.05 139,55.7 WP7113SGD5.C-
N$6
  Top 0.243: WP7113SGD6.C- 188.5,56 188.5,56.5 189,57 191,57 191,56 R32.2
N$7  (via drill 0.35)
  Top 0.243: WP7113SGD7.C- 230,56 v231,55 | v231,48 231,49.15 R33.2
  Bottom 0.243: v231,55 v231,48
N$8  (via drill 0.35)
  Top 0.243: WP7113SGD8.C- v235,96
  Bottom 0.243: v235,96 236.65,97.65 R34.2
SLEEVE
  Top 0.243: U3.2 172.5,106 170.5,108 170.5,113.5 U3.6
  Bottom 0.243: CONNJACKSTEREO_3.5MM_R/A.1 27,84.65 27.29,84.36 28.02,84.36 28.02,84.75 28.01,84.84 27.98,84.92 27.95,85 27.9,85.08 29.18,86.36 29.18,98.45 C1.2 45.24,114.51 169.32,114.51 U3.6
TIP
  Bottom 0.243: U3.7 164.44,105.15 R39.1 44,88.71 33.4,78.1 33.08,78.1 33,78.05 32.92,78.02 32.84,77.99 32.75,77.98 32.36,77.98 32.36,78.71 32.65,79 CONNJACKSTEREO_3.5MM_R/A.2
VCC  (via drill 0.35)
  Top 0.243: U3.4 167.75,82.25 R8.PWR 179,81 192.74,81 196.47,84.73 196.47,89.98 197.71,91.21 198.71,91.21 203.99,96.5 211.49,96.5 217,90.99 R9.PWR | R14.POWER 103.54,39 91.55,39 R13.POWER 94.85,42.3 94.85,47 R40.2 92.85,48.95 92.03,48.12 73.67,48.12 72.85,48.95 R3.2 72.85,49.05 72.03,49.88 53.67,49.88 52.85,49.05 R2.2 67.29,49 70.83,52.54 70.83,54.96 68.96,56.83 62.17,56.83 60.29,58.7 59.71,58.7 57.83,56.83 49.65,56.83 41.83,49 R1.2 32.85,66.57 C3.LL+ | R4.PWR 44,86.5 44,108 v45,109 | v221,110 v230,110 | v218,109 216,107 v214,107
  Bottom 0.243: 135.5,40 129,40 127.5,41.5 FSR1.P$2 126.5,41.5 129.55,44.55 140.19,44.55 171.5,75.87 171.5,77.04 172.96,78.5 173.92,78.5 177.94,82.52 177.94,85.09 178.91,86.06 182.06,86.06 184.7,88.71 184.7,89.29 184.29,89.7 183.71,89.7 180.96,86.96 178.54,86.96 177.04,85.46 177.04,82.89 174.09,79.94 173.13,79.94 170.6,77.41 170.6,76.24 139.81,45.45 126.71,45.45 126,46.16 126,48.65 R10.2 124.65,58.66 124.7,58.71 124.7,61.01 128.24,64.55 143.55,64.55 169.7,90.71 169.7,91.29 169.29,91.7 168.71,91.7 142.45,65.45 126.71,65.45 126.3,65.86 126.3,71.3 R7.PWR | 135.5,40 137,41.5 FSR2.P$2 | 145.5,40 147,41.5 FSR3.P$2 | 135.5,40 145.5,40 | 145.5,40 155.5,40 157,41.5 FSR4.P$2 157.5,41.5 159,40 171.5,40 | 228,44 228,41.5 FSR11.P$2 227,41.5 225.5,40 215.5,40 | R12.2 214,48 214,46 227.99,46 228.7,45.29 228.7,44.71 228,44.01 228,44 | 228,44 237,44 237,41.5 FSR12.P$2 | 170.5,41 170,41.5 FSR5.P$2 | 175.5,40 177,41.5 FSR6.P$2 | 171.5,40 175.5,40 | 170.5,41 171.5,40 | 170.5,41 R11.2 | 185.5,40 187,41.5 FSR7.P$2 | 175.5,40 185.5,40 | 195.5,40 197,41.5 FSR8.P$2 | 185.5,40 195.5,40 | 205.5,40 207,41.5 FSR9.P$2 | 195.5,40 204.01,40 | 215.5,40 217,41.5 FSR10.P$2 | 205.5,40 215.5,40 | U3.4 168,106 175.5,113.5 U3.8 | 42.5,74 45,74 C2.2 | 42.5,74 40.5,74 40,73.5 C3.LL+ | 42.5,74 48,79.5 51,79.5 R4.PWR 54.5,77.5 55,78 61,78 63,76 R5.PWR 77.5,73 91.5,73 R6.PWR | 205.5,40 204.01,40 | 232.36,115.73 233.19,114.9 237.65,114.9 U$1.VIN | 135.5,40 133.5,38 R14.POWER | 204.01,40 198.16,45.85 195.52,45.85 194.85,46.52 194.85,47.48 197.38,50 197.38,56.38 R9.PWR 215.84,74.84 178.52,74.84 177.84,75.52 177.84,76.48 180.29,78.93 185.53,78.93 198.49,91.89 198.49,93.63 195.92,96.19 193.04,96.19 192.53,95.68 187.51,95.68 187.47,95.64 183.75,95.64 183.23,95.12 181.91,95.12 180.97,96.06 180.97,97.38 181.91,98.32 186.36,98.32 186.4,98.36 191.42,98.36 191.93,98.87 197.72,98.87 199.13,100.28 199.13,100.75 205.38,107 v214,107
  Bottom 0.243: 232.36,115.73 231.11,114.48 230.65,114.48 230,113.84 v230,110 | v221,110 220,109 v218,109 | v45,109 46,108 46,106 44.85,106 R39.2 | 232.36,115.73